# Altium PCB IG-2.PCBDOC (part 3 of 3)
Units mm, origin at the board's own origin, x right, y up, seen from the top; angles counter-clockwise.
Board outline 46.6 x 24.5 mm, 4 copper layers (Top, GND Plane, Mid1-Ver, Bottom), stack 1.565 mm thick; 34 components, 46 nets, 339 pads, 275 vias.
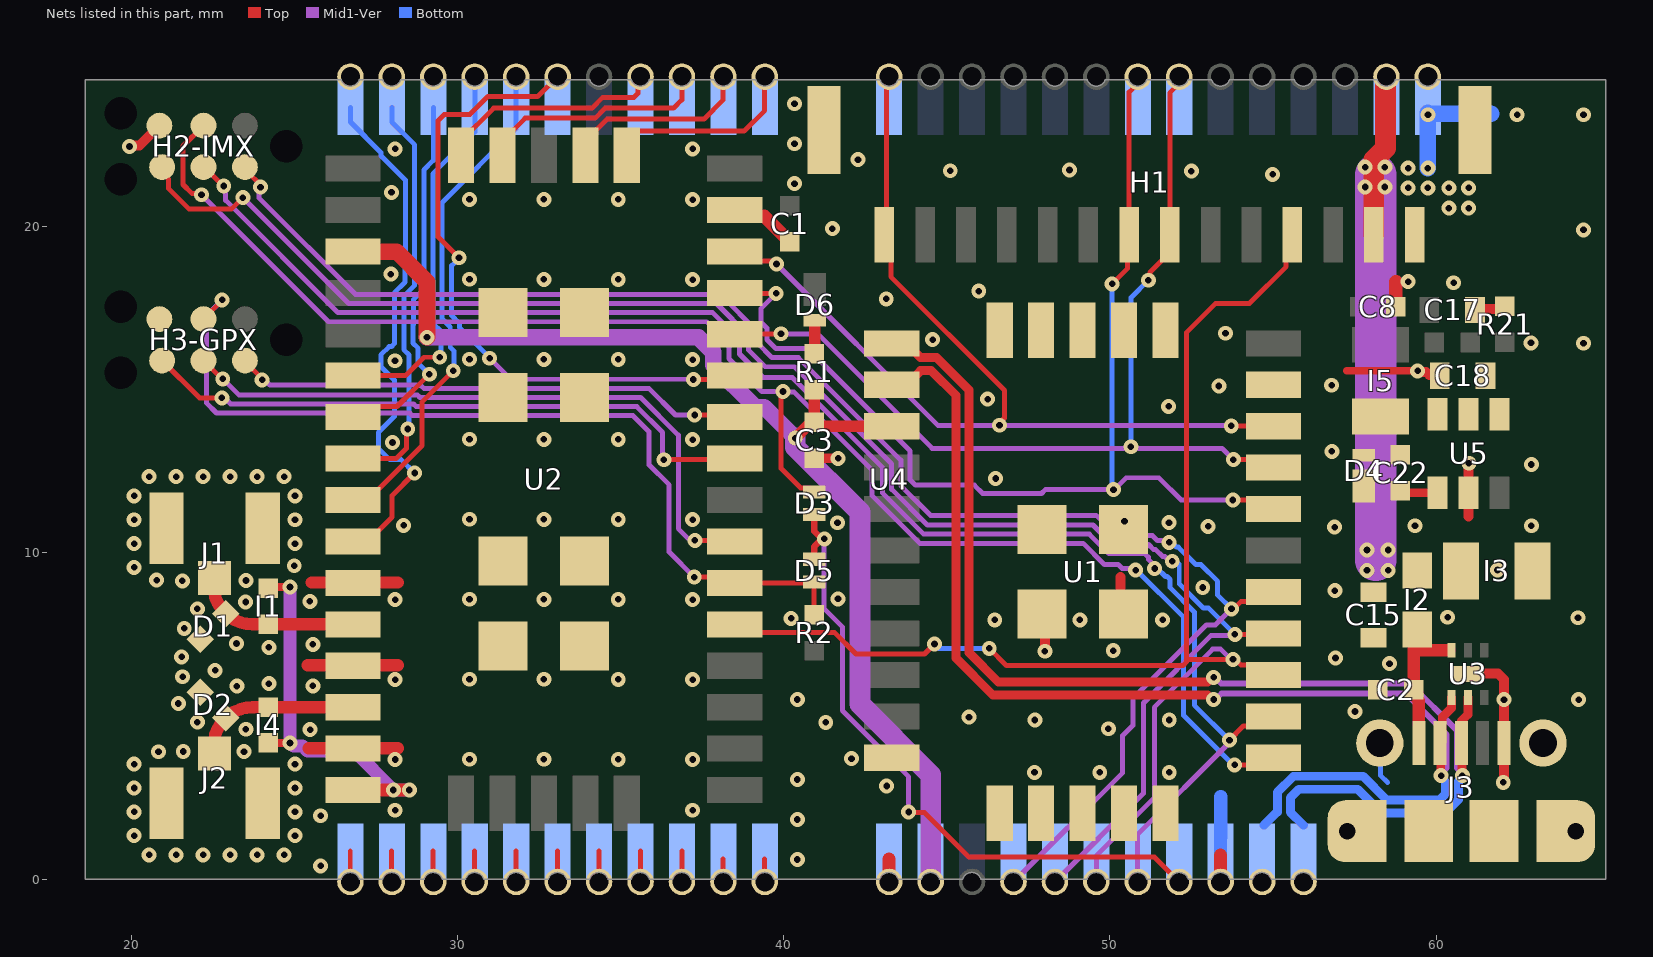
[diagram p4: the nets of this part, all layers, seen from the top]

## Via types
v1: diameter 0.457, hole 0.203, Top to Bottom, 275 vias

## Nets (pads, with @x,y where several pads share a name; then routed paths per layer and width w, separated by ;. In a path a pad name is that pad's centre, name@x,y a point inside that pad or via, vN(x,y) a via of type N, cw(c..) or ccw(c..) an arc to the next point about the centre after c; other vN are vias at no path point) (continued)
G11/SWDIO: H2-IMX.2 U1.16 U4.18 | length 50.1
  Top w0.152: H2-IMX.2@23.49,21.82 23.49,21.661 23.577,21.661 23.965,21.274 v1(23.965,21.203) ; v1(53.723,8.279) 53.792,8.279 54.011,8.498 54.888,8.498 U1.16@55.186,8.797
  Mid1-Ver w0.152: v1(23.965,21.203) 23.928,21.165 23.928,20.866 26.877,17.917 38.057,17.917 39.207,16.766 39.207,16.415 39.643,15.979 40.448,15.979 43.59,12.837 43.59,12.056 44.499,11.148 49.576,11.148 50.195,10.529 51.298,10.529 51.452,10.374 51.754,10.374 v1(51.812,10.316) ; U4.18@47.043,-0.09 50.388,3.255 50.388,4.396 50.699,4.707 50.699,5.534 52.956,7.79 53.235,7.79 v1(53.723,8.279)
  Bottom w0.152: v1(51.812,10.316) 51.895,10.316 52.039,10.172 52.096,10.172 52.635,9.633 52.791,9.633 53.3,9.125 53.3,8.702 v1(53.723,8.279)
G12/SWO: H2-IMX.6 U1.15 U4.19 | length 51.8
  Top w0.152: H2-IMX.6@20.95,21.82 20.95,21.647 21.141,21.456 21.141,21.166 21.769,20.538 23.083,20.538 v1(23.428,20.883) ; v1(53.825,7.498) 55.158,7.498 U1.15@55.186,7.527
  Mid1-Ver w0.152: v1(23.428,20.883) 26.673,17.637 37.941,17.637 38.928,16.65 38.928,16.207 39.435,15.7 40.332,15.7 42.294,13.738 43.311,12.721 43.311,11.941 44.404,10.848 49.481,10.848 50.079,10.25 51.182,10.25 51.337,10.095 51.403,10.095 51.614,9.884 51.683,9.884 51.827,9.74 v1(51.909,9.74) ; U4.19@48.313,-0.09 51.029,2.626 51.029,5.397 53.093,7.46 53.787,7.46 v1(53.825,7.498)
  Bottom w0.152: 52.123,9.651 52.123,9.044 52.867,8.3 53.023,8.3 v1(53.825,7.498)
G14/SWCLK: H2-IMX.4 U1.13 U4.21 | length 48.9
  Top w0.152: H2-IMX.4@22.22,21.812 22.248,21.812 22.82,21.24 v1(22.84,21.24) ; v1(53.661,4.255) 53.661,4.263 54.086,4.688 54.888,4.688 U1.13@55.186,4.987
  Mid1-Ver w0.152: v1(22.84,21.24) 22.898,21.182 22.898,20.802 26.342,17.358 37.825,17.358 38.648,16.535 38.648,16.091 39.368,15.372 40.265,15.372 43.032,12.605 43.032,11.825 44.288,10.568 49.366,10.568 49.964,9.97 51.066,9.97 51.174,9.863 51.174,9.796 51.369,9.601 v1(51.369,9.519) ; U4.21@50.847,-0.09 50.847,1.372 53.661,4.186 v1(53.661,4.255)
  Bottom w0.152: v1(51.369,9.519) 51.451,9.519 51.7,9.27 51.754,9.27 51.844,9.181 51.844,8.929 52.586,8.186 52.586,5.329 v1(53.661,4.255)
GND: C1.2 C2.2 C3.2 C8.2 C15.2 C17.2 C18.2 D1.2 D2.2 D4.A H1.0 H1.1 H2-IMX.5 H3-GPX.5 J1.2 J1.3 J2.2 J2.3 J3.5 J3.6 J3.7 J3.8 J3.9 R21.1 U1.0 U1.11 U1.21 U1.23 U1.24 U2.0 U2.11 U2.13 U2.15 U2.31 U3.7 U4.1 U4.15 U4.23 U4.37 U4.38 U4.39 U4.40 U4.41 U4.42 U4.43 U4.44 U4.45 U4.46 U4.47 U5.2 | length 41.1
  Top w0.152: U4.37@26.717,0.16 26.717,0.86 ; U4.38@27.987,0.16 27.987,0.86 ; U4.39@29.257,0.16 29.257,0.86 ; U4.40@30.527,0.16 30.527,0.86 ; U4.41@31.797,0.16 31.797,0.86 ; U4.42@33.067,0.16 33.067,0.86 ; U4.43@34.337,0.16 34.337,0.86 ; U4.44@35.607,0.16 35.607,0.86 ; U4.45@36.877,0.16 36.877,0.86 ; U4.46@38.147,-0.09 38.147,0.61 ; U4.47@39.417,-0.09 39.417,0.61 ; v1@42.059,3.671 v1(42.078,3.69)
  Top w0.229: 57.261,15.572 v1@59.503,15.572
  Top w0.3: v1(59.43,15.572) 59.46,15.542 59.688,15.542 59.788,15.442
  Top w0.305: v1(19.95,22.45) 19.979,22.479 20.259,22.479 H2-IMX.5@20.87,23.09 ; C3.2@40.942,12.896 41.664,12.896 v1(41.67,12.89) ; U1.0@47.911,8.117 48.004,8.024 v1(48.004,6.981) ; U1.0@50.318,8.21 50.318,9.252 ; U3.7@60.969,6.285 60.981,6.297 61.892,6.297 62.071,6.119 v1@62.071,3.168 ; 60.988,11.108 U5.2@60.988,11.842 60.994,11.848 60.994,12.736 v1(60.999,12.742) ; C17.2@61.188,17.442 61.213,17.467 62.063,17.467 R21.1@62.088,17.492
  Top w0.378: 25.41,6.548 28.175,6.548 ; 25.45,4.008 28.175,4.008 ; 25.54,9.088 28.175,9.088
  Top w0.406: U2.31@38.501,20.506 38.698,20.309 39.401,20.309 C1.2@40.185,19.525 ; U4.15@43.227,-0.09 43.227,0.61 ; U4.23@53.387,-0.09 53.39,0.739 ; C8.2@58.755,17.541 58.755,18.307 58.773,18.307
  Bottom w0.152: J3.6@58.296,3.929 58.296,3.17 58.504,2.961
  Bottom w0.406: U4.23@53.387,-0.09 53.394,2.53
  Bottom w0.508: v1(59.741,21.787) 59.737,21.791 59.737,23.475 59.759,23.453 61.687,23.453
  other v1: 25.811,0.405 40.42,0.6 20.552,0.741 21.38,0.741 22.208,0.741 23.036,0.741 23.864,0.741 24.692,0.741 20.092,1.33 25.024,1.33 40.42,1.825 25.811,1.94 20.092,2.06 25.024,2.06 28.093,2.107 37.21,2.107 20.092,2.79 25.024,2.79 43.156,2.85 62.053,2.964 40.42,3.05 47.685,3.27 49.685,3.27 51.817,3.27 20.092,3.52 25.024,3.52 28.093,3.661 32.651,3.67 34.931,3.669 37.21,3.661 30.372,3.671 20.84,3.9 21.6,3.91 23.461,3.905 25.489,4.579 23.52,4.59 49.952,4.607 22.03,4.81 41.288,4.8 47.7,4.872 51.817,4.872 45.681,4.962 57.509,5.133 21.45,5.38 62.074,5.498 64.361,5.498 40.42,5.5 23.24,5.91 25.57,5.92 24.222,5.99 28.093,6.113 30.372,6.123 32.651,6.121 34.931,6.12 37.21,6.113 21.58,6.2 22.574,6.393 58.566,6.603 56.912,6.772 21.55,6.81 50.1,7 24.222,7.098 25.57,7.19 23.23,7.22 21.63,7.68 46.47,7.943 49.077,7.943 51.614,7.943 40.23,7.99 64.343,8.007 60.35,8.023 22.03,8.28 23.51,8.49 25.48,8.51 28.093,8.564 34.931,8.571 37.21,8.564 30.372,8.574 32.651,8.573 41.664,8.588 56.894,8.838 52.843,8.935 21.57,9.14 23.522,9.15 20.782,9.161 61.877,9.469 20.092,9.551 25,9.6 20.092,10.281 25.024,10.281 53.009,10.807 56.885,10.785 59.348,10.827 62.914,10.826 28.353,10.837 41.65,10.92 51.809,10.92 50.444,10.961 20.092,11.011 25.024,11.011 30.372,11.026 32.651,11.024 34.931,11.023 37.21,11.016 20.092,11.741 25.024,11.741 46.495,12.275 20.552,12.33 21.38,12.33 22.208,12.33 23.036,12.33 23.864,12.33 24.692,12.33 62.914,12.703 56.798,13.108 28.01,13.38 34.931,13.474 37.21,13.467 30.372,13.477 32.651,13.476 51.799,14.484 46.251,14.709 53.335,15.11 56.792,15.132 28.087,15.884 30.372,15.929 32.651,15.927 34.931,15.927 37.21,15.919 64.51,16.419 62.904,16.432 44.567,16.531 53.54,16.727 43.144,17.781 45.978,18.018 60.532,18.273 59.136,18.31 37.21,18.37 30.372,18.38 32.651,18.379 34.931,18.377 27.962,18.538 64.51,19.896 41.492,19.932 60.387,20.561 60.991,20.561 30.372,20.831 32.651,20.83 34.931,20.829 37.21,20.821 27.979,21.043 59.136,21.18 59.741,21.18 60.387,21.18 60.991,21.18 40.33,21.31 54.984,21.595 52.494,21.694 45.104,21.705 48.761,21.727 59.136,21.787 42.277,22.047 28.093,22.376 37.21,22.376 40.33,22.535 59.745,23.422 62.477,23.422 64.51,23.422 40.33,23.76
GNSS1_ANT: D1.1 I1.2 J1.1 U2.12 | length 5.2
  Top w0.378: J1.1@22.524,9.225 22.524,9.006 ccw(c23.724,9.006) 23.724,7.806 U2.12@26.801,7.806
GNSS1_PPS: H1.14 U1.20 U2.30 U4.14 | length 31.2
  Top w0.152: U2.30@38.501,19.236 38.8,18.937 39.624,18.937 39.711,18.85 v1(39.78,18.85) ; U4.14@43.228,24.539 43.157,24.468 43.157,19.822 H1.14@43.087,19.751 43.285,19.553 43.285,18.459 46.767,14.978 46.767,14.127 46.614,13.975 v1(46.614,13.906) ; v1(53.715,13.89) 55.173,13.89 U1.20@55.186,13.877
  Mid1-Ver w0.152: v1(39.78,18.85) 44.724,13.906 v1(46.614,13.906) 46.616,13.904 v1@53.715,13.904 ; U4.14@43.215,24.572 U4.14@43.233,24.59
GNSS2_ANT: D2.1 I4.2 J2.1 U2.14 | length 5.2
  Top w0.378: J2.1@22.524,3.846 22.524,4.066 cw(c23.724,4.066) 23.724,5.266 U2.14@26.801,5.266
GNSS2_PPS: H1.4 U1.14 U2.21 U4.20 | length 41.9
  Top w0.152: U2.21@38.501,7.806 38.749,7.558 41.553,7.558 42.215,6.896 44.316,6.896 v1(44.623,7.203) ; v1(46.3,7.07) 46.83,6.54 52.236,6.54 52.341,6.645 52.341,6.734 52.341,16.744 53.24,17.642 54.274,17.642 55.398,18.766 55.398,19.562 H1.4@55.587,19.751 ; 52.367,6.734 53.84,6.734 54.019,6.555 54.713,6.555 U1.14@55.011,6.257
  Mid1-Ver w0.152: U4.20@49.583,-0.09 49.583,0.713 51.36,2.49 51.36,5.26 53.145,7.046 53.391,7.046 53.703,6.734 v1(53.772,6.734)
  Bottom w0.152: v1(44.623,7.203) 44.756,7.07 v1(46.3,7.07)
GPX_G5/SCLK: U2.9 U4.32 | length 15.6
  Top w0.152: U2.9@26.801,11.616 27.251,11.616 28.922,13.286 28.922,14.626 v1(29.873,15.577)
  Bottom w0.152: v1(29.873,15.577) 29.892,15.596 29.892,16.185 29.781,16.296 29.781,16.92 29.529,17.172 29.529,20.73 31.803,23.004 U4.32@31.803,23.65 U4.32@31.803,24.25 U4.32@31.803,24.59
GPX_G6/Rx1/MOSI: U2.6 U4.33 | length 11.8
  Top w0.152: U2.6@26.801,15.426 28.411,15.426 28.976,15.99 v1(29.46,15.99)
  Bottom w0.152: v1(29.46,15.99) 29.502,16.032 29.502,16.779 29.249,17.031 29.249,21.614 30.533,22.898 U4.33@30.533,23.65 U4.33@30.533,24.25
GPX_G7/Tx1/MISO: U2.7 U4.34 | length 11.5
  Top w0.152: U2.7@26.801,14.156 27.125,14.479 28.151,14.479 v1(29.141,15.469)
  Bottom w0.152: v1(29.141,15.469) 28.798,15.812 28.798,16.262 28.638,16.421 28.638,16.973 28.659,16.994 28.659,17.766 28.97,18.077 28.97,21.73 29.263,22.023 U4.34@29.263,23.65
GPX_G8/C\S\: U2.8 U4.35 | length 12.7
  Top w0.152: U2.8@26.801,12.886 28.126,12.886 28.442,13.201 28.442,13.753 v1(28.48,13.791)
  Bottom w0.152: U4.35@27.993,23.65 27.993,23.2 28.691,22.502 28.691,18.193 28.359,17.861 28.359,16.222 28.518,16.063 28.518,13.829 v1(28.48,13.791)
GPX_G9/S\P\I\_\E\N\: U2.10 U4.36 | length 16.5
  Top w0.152: U2.10@26.801,10.346 27.251,10.346 27.997,11.091 27.997,11.751 v1(28.688,12.442)
  Bottom w0.152: U4.36@26.723,23.65 26.723,23.2 27.661,22.262 27.661,22.167 28.411,21.417 28.411,19.121 28.394,19.104 28.394,18.291 28.069,17.966 28.069,16.405 27.98,16.316 27.908,16.316 27.655,16.063 27.655,15.705 28.064,15.296 28.074,15.296 28.074,14.178 27.578,13.682 27.578,13.201 27.929,12.851 28.279,12.851 v1(28.688,12.442)
GPX_G10/BOOT: U2.27 U4.31 | length 20.2
  Top w0.152: v1(30.05,19.04) 29.412,19.678 29.412,23.246 29.594,23.429 30.383,23.429 30.934,23.98 32.463,23.98 U4.31@33.073,24.59 ; v1(37.23,15.31) 38.386,15.31 U2.27@38.501,15.426
  Mid1-Ver w0.152: v1(30.99,15.96) 31.634,15.316 37.224,15.316 v1(37.23,15.31)
  Bottom w0.152: v1(30.05,19.04) 30.05,19.024 29.825,18.798 29.825,17.271 30.061,17.036 30.061,16.909 30.99,15.98 v1(30.99,15.96)
GPX_G11/SWDIO: H3-GPX.2 U2.26 | length 15.8
  Top w0.152: H3-GPX.2@23.49,15.89 23.49,15.855 24.015,15.33 v1(24.015,15.296) ; v1(37.27,14.22) 38.437,14.22 U2.26@38.501,14.156
  Mid1-Ver w0.152: v1(24.015,15.296) 24.098,15.296 24.254,15.14 28.859,15.14 28.889,15.11 28.896,15.11 28.969,15.037 35.866,15.037 36.683,14.22 v1(37.27,14.22)
GPX_G12/SWO: H3-GPX.6 U2.25 | length 19.3
  Top w0.152: H3-GPX.6@20.95,15.89 22.095,14.745 v1(22.784,14.745) ; v1(36.33,12.85) 38.466,12.85 U2.25@38.501,12.886
  Mid1-Ver w0.152: v1(22.784,14.745) 22.867,14.745 23.052,14.56 28.656,14.56 28.738,14.478 35.499,14.478 36.291,13.687 36.291,12.889 v1(36.33,12.85)
GPX_G16/QDEC0.A: U2.38 U4.26 | length 6.1
  Top w0.152: U2.38@35.191,22.176 35.191,22.626 35.49,22.924 38.791,22.924 39.417,23.55 U4.26@39.417,24.59
GPX_G17/QDEC0.B: U2.39 U4.27 | length 5.7
  Top w0.152: U2.39@33.921,22.176 33.921,22.626 34.591,23.295 37.562,23.295 38.147,23.88 U4.27@38.147,24.34
GPX_G18/QDEC1.A: U2.41 U4.28 | length 6.9
  Top w0.152: U2.41@31.381,22.176 31.381,22.626 32.076,23.32 34.221,23.32 34.526,23.625 36.622,23.625 36.877,23.88 U4.28@36.877,24.34
GPX_G19/QDEC1.B: U2.42 U4.29 | length 7
  Top w0.152: U2.42@30.111,22.176 30.111,22.626 31.111,23.625 34.126,23.625 34.456,23.955 35.411,23.955 35.53,24.074 35.53,24.507 U4.29@35.613,24.59
GPX_nRESET: D5.A H3-GPX.3 R2.2 U2.22 | length 28
  Top w0.152: H3-GPX.3@22.16,17.16 H3-GPX.3@22.22,17.16 22.22,17.168 22.791,17.739 v1(22.791,17.748) ; v1(37.26,9.25) 38.327,9.25 U2.22@38.501,9.076 40.761,9.076 40.785,9.1 D5.A@40.935,9.1 40.935,8.103 R2.2@40.942,8.097
  Mid1-Ver w0.152: v1(22.791,17.748) 22.306,17.262 22.306,14.594 22.619,14.281 28.54,14.281 28.622,14.199 35.384,14.199 35.874,13.708 35.874,12.695 36.49,12.079 36.49,10.02 v1(37.26,9.25)
GPX_Rx: H1.7 U1.19 U2.28 U4.7 | length 30.3
  Top w0.152: U2.28@38.501,16.696 38.516,16.71 v1(39.918,16.71) ; v1(51.178,18.352) 51.226,18.4 51.226,18.591 51.837,19.201 H1.7@51.837,19.751 51.837,24.093 52.118,24.374 U4.7@52.118,24.539 ; v1(53.782,12.851) 54.941,12.851 U1.19@55.186,12.607
  Mid1-Ver w0.152: v1(39.918,16.71) 41.04,16.71 44.549,13.201 50.594,13.201 v1(50.642,13.249) ; v1@50.642,13.201 53.433,13.201 v1(53.782,12.851)
  Bottom w0.152: v1(50.642,13.249) 50.642,17.816 v1(51.178,18.352)
GPX_SWCLK: H3-GPX.4 U2.23 | length 20.3
  Top w0.152: H3-GPX.4@22.22,15.89 22.78,15.33 v1(22.81,15.33) ; v1(37.28,10.38) 38.467,10.38 U2.23@38.501,10.346
  Mid1-Ver w0.152: v1(22.81,15.33) 23.301,14.839 28.772,14.839 28.853,14.758 35.615,14.758 36.769,13.603 36.769,10.737 37.077,10.429 37.231,10.429 v1(37.28,10.38)
GPX_Tx: H1.8 U1.18 U2.29 U4.8 | length 34.7
  Top w0.152: U2.29@38.501,17.966 38.517,17.95 v1(39.77,17.95) ; v1@50.067,11.974 v1(50.109,11.932) ; v1@50.067,18.242 50.541,18.715 50.541,19.705 H1.8@50.587,19.751 50.587,24.113 50.848,24.374 U4.8@50.848,24.539 ; v1(53.764,11.616) 54.907,11.616 U1.18@55.186,11.337
  Mid1-Ver w0.152: v1(39.77,17.95) 39.309,17.489 39.309,17.06 39.487,16.882 39.487,16.531 39.759,16.259 40.737,16.259 43.878,13.118 43.878,12.229 44.038,12.069 45.845,12.069 46.097,11.817 47.904,11.817 48.018,11.932 50.131,11.932 50.497,12.298 51.498,12.298 52.18,11.616 v1(53.764,11.616)
  Bottom w0.152: v1@50.067,11.974 v1@50.067,18.242
  other v1: 50.067,18.238
IMX_nRESET: D3.A H2-IMX.3 U1.12 | length 49.1
  Top w0.152: v1(22.16,20.97) 22.114,21.016 21.864,21.016 21.593,21.287 21.593,22.463 H2-IMX.3@22.22,23.09 ; v1(39.98,14.94) 39.923,14.883 39.923,12.579 40.513,11.989 40.812,11.989 D3.A@40.935,11.865 ; v1(53.82,3.498) 54.737,3.498 U1.12@54.956,3.717
  Mid1-Ver w0.152: v1(22.16,20.97) 26.051,17.079 37.637,17.079 38.318,16.398 38.318,15.954 39.332,14.94 v1(39.98,14.94) 39.991,14.929 40.311,14.929 42.701,12.539 42.701,11.76 44.172,10.289 49.178,10.289 49.827,9.64 50.254,9.64 50.37,9.524 50.729,9.524 v1(50.787,9.465)
  Bottom w0.152: v1(50.787,9.465) 50.811,9.465 52.256,8.02 52.256,5.013 53.771,3.498 v1(53.82,3.498)
NetC22_1: C22.1 U5.1 | length 1.2
  Top w0.254: C22.1@58.892,12.027 58.892,12.021 59.071,11.842 U5.1@60.038,11.842
NetD6_C: D6.C R1.1 | length 1
  Top w0.356: R1.1@40.942,16.096 40.95,16.104 40.95,17.122 D6.C@40.958,17.13
nRESET: D3.C D5.C U4.22 | length 20.4
  Top w0.152: v1(43.83,2.055) 43.845,2.04 44.31,2.04 45.676,0.674 51.359,0.674 U4.22@52.123,-0.09
  Top w0.203: D5.C@40.935,9.8 40.935,10.187 41.123,10.375 41.198,10.375 v1(41.247,10.423) 41.198,10.472 41.124,10.472 40.935,10.661 D3.C@40.935,11.165
  Mid1-Ver w0.152: v1@41.232,10.438 41.232,8.298 41.8,7.73 41.8,5.164 43.83,3.134 v1(43.83,2.055)
SW: C22.2 D4.C I5.1 U5.6
USB.D_N: J3.2 U1.2 U3.1 U4.24 | length 38.8
  Top w0.272: 45.284,14.819 45.284,6.769 46.413,5.64 52.985,5.64 53.125,5.5 v1(53.175,5.5)
  Top w0.273: U1.2@42.611,15.159 43.773,15.159 44.196,15.582 44.521,15.582 45.284,14.819 ; v1(60.151,3.167) 60.135,3.183 60.135,4.151 J3.2@60.12,4.167 60.184,4.231 60.184,4.96 60.469,5.246 U3.1@60.469,5.56
  Mid1-Ver w0.177: v1(53.175,5.5) 53.232,5.5 53.419,5.687 59.068,5.687 60.324,4.431 60.324,3.411 60.151,3.238 v1(60.151,3.167)
  Bottom w0.272: U4.24@54.716,1.647 55.128,2.06 55.128,2.654 55.623,3.149 57.758,3.149 58.489,2.417 60.094,2.417 60.277,2.6 60.277,2.991 60.151,3.117 v1(60.151,3.167)
USB.D_P: J3.3 U1.1 U3.2 U4.25 | length 39.2
  Top w0.272: 45.683,14.985 45.683,6.934 46.578,6.039 52.985,6.039 53.125,6.179 v1(53.175,6.179)
  Top w0.273: U1.1@42.611,16.429 43.748,16.429 44.196,15.982 44.686,15.982 45.683,14.985 ; J3.3@60.77,4.167 60.77,4.842 60.969,5.041 U3.2@60.969,5.56 ; J3.3@60.785,4.167 60.785,3.183 v1(60.801,3.167)
  Mid1-Ver w0.177: v1(53.175,6.179) 53.221,6.179 53.409,5.991 59.194,5.991 60.628,4.557 60.628,3.411 60.801,3.238 v1(60.801,3.167)
  Bottom w0.272: U4.25@55.932,1.647 55.527,2.051 55.527,2.488 55.789,2.75 57.592,2.75 58.324,2.018 60.259,2.018 60.675,2.434 60.675,2.991 60.801,3.117 v1(60.801,3.167)
USB.VBUS: C2.1 I2.2 J3.1 U3.6 | length 3.5
  Top w0.381: I2.2@59.307,7.302 C2.1@59.307,5.799 59.417,5.69 59.417,5.517 59.467,5.467 J3.1@59.467,4.747 ; 59.543,7.009 U3.6@60.404,7.009
VANT: I1.1 I4.1 U2.16 | length 12.1
  Top w0.254: I1.1@24.204,8.906 24.204,8.95 v1(24.871,8.95) ; I4.1@24.209,4.171 v1@24.85,4.17
  Top w0.4: U2.16@26.801,2.73 v1(28.04,2.73) v1(28.53,2.73)
  Mid1-Ver w0.4: v1(24.871,8.95) v1(24.871,4.17) 24.886,4.17 24.981,4.076 25.254,4.076 25.413,3.917 26.853,3.917 v1(28.04,2.73) v1(28.53,2.73)
VBAT: C3.1 R1.2 U1.3 U2.3 U4.16 | length 36
  Top w0.356: v1(40.355,13.513) C3.1@40.714,13.872 ; C3.1@40.942,13.872 U1.3@42.966,13.872 ; C3.1@40.942,13.996 R1.2@40.942,14.996
  Top w0.508: U2.3@26.801,19.236 26.813,19.224 28.148,19.224 29.07,18.302 v1(29.07,16.6)
  Mid1-Ver w0.508: v1(29.07,16.6) 37.391,16.6 37.836,16.155 37.836,15.754 39.133,14.457 39.41,14.457 v1(40.355,13.513)
  Mid1-Ver w0.635: v1(40.355,13.513) 40.355,13.23 42.337,11.248 42.337,5.363 44.503,3.197 U4.16@44.503,-0.09
VIN: C15.1 H1.2 I2.1 I3.1 U4.2 | length 16.8
  Top w0.635: H1.2@58.087,19.751 58.087,22.043 58.442,22.399 58.442,24.514 U4.2@58.468,24.539
  Mid1-Ver w1.27: 58.138,9.772 58.138,21.213 58.138,21.58
  other v1: 57.878,9.462 58.524,9.462 57.878,10.084 58.524,10.084 57.819,21.209 58.424,21.209 57.819,21.816 58.424,21.816
VIN_P: C18.1 I3.2 U5.4 U5.5
pads on no net: H2-IMX.0 H3-GPX.0 J3.4 U2.1 U2.2 U2.4 U2.5 U2.17 U2.18 U2.19 U2.20 U2.24 U2.33 U2.34 U2.35 U2.36 U2.37 U3.3 U3.4 U3.5 U4.4

## Polygon pours and split planes (outlines as drawn)
GND on Top "GND_L01_P014" (solid, remove dead copper, pour order 14): 19.17,0.517 19.17,24 64.744,24 64.744,0.517
GND on Top "RF_GND_L-01_P-001" (solid, pour order 12): 19.17,12.9 26.163,12.9 26.163,0.51 19.17,0.51
GND on Top "NONET_L-01_P-001" (solid, pour order 15): 59.126,24.25 59.126,19.021 58.455,18.349 58.455,17.241 64.863,17.241 64.888,17.266 64.888,24.25
+3.3V on Mid1-Ver "+3.3V_L03_P010" (solid, remove dead copper, pour order 10): 19.15,0.25 19.15,24.25 64.785,24.25 64.785,0.25
GND on Mid1-Ver "RF_GND_L-03_P-001" (solid, pour order 9): 18.95,12.9 26.163,12.9 26.163,0.33 18.95,0.33
GND on Bottom "GND_L04_P013" (solid, remove dead copper, pour order 13): 19.17,0.517 19.17,24 64.744,24 64.744,0.517
GND on GND Plane (split plane): 616 vertices, not listed, extent 18.856,0.256 64.944,24.244

## Other copper
Top:
  region net VIN: 57.673,8.541 61.174,8.541 61.174,10.318 59.874,10.318 57.673,10.318
  region net +3.3V: 59.171,16.031 58.999,15.859 56.371,15.859 56.211,16.031 54.452,16.031 54.452,16.81 56.537,18.894 56.537,19.126 57.137,19.126 57.137,18.819 58.205,17.751 58.205,17.083 59.256,17.083 59.256,17.817 60.24,17.817 60.24,16.173 60.098,16.031
  region net VIN_P: 63.509,10.316 63.154,10.316 63.154,8.573 64.97,8.573 64.97,15.842 62.238,15.842 61.447,15.842 61.44,15.834 61.324,15.836 61.33,15.485 60.688,14.843 60.688,13.234 63.509,13.234
  region net SW: 57.415,15.301 57.415,12.894 60.34,12.894 60.34,14.651 59.165,14.651 59.165,15.301
Mid1-Ver:
  region net +3.3V: 56.759,18.663 56.759,17.067 56.509,16.817 55.1,16.817 54.808,17.109 56.362,18.663
Bottom:
  region net +3.3V: 56.759,18.663 56.759,17.067 56.509,16.817 55.1,16.817 54.808,17.109 56.362,18.663

## Silkscreen, mask and mechanical layers (free items; w line width, h text height)
Silkscreen Top:
  region: 51.693,9.909 cw(c49.239,9.909) 51.693,9.913 cw(c51.586,9.913) 51.693,9.913 cw(c51.586,9.913) 51.478,9.913 ccw(c49.239,9.909) 51.478,9.909 cw(c51.586,9.909)
  region: 49.134,8.756 49.134,8.258 49.347,8.258 49.347,8.788
  region: 49.244,11.639 48.926,11.101 49.135,11.009 49.135,10.822 49.347,10.848 49.347,11.009 49.551,11.096
  region: 50.472,10.687 49.934,11.005 49.842,10.796 49.817,10.796 49.842,10.584 49.929,10.38
  region: 49.818,10.796 49.598,10.788 49.311,10.762 49.172,10.743 48.935,10.698 48.805,10.665 48.64,10.608 48.534,10.553 48.478,10.518 48.438,10.486 48.396,10.446 48.369,10.405 48.346,10.369 48.333,10.333 48.324,10.296 48.321,10.261 48.321,10.221 48.325,10.192 48.34,10.146 48.358,10.106 48.385,10.068 48.431,10.02 48.474,9.984 48.526,9.948 48.605,9.907 48.692,9.866 48.794,9.827 48.894,9.793 48.988,9.764 49.079,9.739 49.079,9.962 48.94,10.002 48.808,10.047 48.699,10.094 48.614,10.139 48.581,10.166 48.549,10.201 48.537,10.224 48.533,10.247 48.533,10.272 48.546,10.297 48.569,10.323 48.6,10.348 48.634,10.37 48.679,10.392 48.731,10.415 48.775,10.43 48.824,10.448 48.888,10.465 48.962,10.485 49.066,10.507 49.176,10.527 49.283,10.543 49.429,10.559 49.609,10.577 49.841,10.59
  region: 49.134,10.435 49.134,9.142 49.347,9.174 49.347,10.468
  region: 48.51,8.807 48.824,8.816 49.097,8.839 49.309,8.867 49.546,8.913 49.676,8.946 49.84,9.003 49.947,9.058 50.003,9.093 50.042,9.124 50.085,9.165 50.112,9.205 50.135,9.242 50.148,9.278 50.157,9.315 50.16,9.349 50.16,9.39 50.155,9.419 50.14,9.465 50.123,9.505 50.095,9.542 50.05,9.591 50.006,9.627 49.955,9.662 49.876,9.704 49.788,9.745 49.687,9.784 49.587,9.817 49.493,9.846 49.401,9.872 49.401,9.649 49.541,9.609 49.673,9.563 49.782,9.517 49.866,9.472 49.9,9.445 49.932,9.409 49.943,9.386 49.948,9.363 49.948,9.339 49.935,9.314 49.911,9.288 49.88,9.262 49.846,9.241 49.802,9.218 49.75,9.196 49.705,9.18 49.656,9.163 49.593,9.146 49.519,9.126 49.414,9.103 49.304,9.084 49.198,9.068 49.052,9.052 48.872,9.034 48.51,9.017
  text "IG-2.0.3" at 64.969,16.013 h1.65 r90
  text "1" at 18.788,9.657 h2.5
  text "2" at 18.788,1.227 h2.5
Silkscreen Bottom:
  text "'.PcbRevision'" at 60.144,5.864 h2.03
Dimensions:
  drawing of 295 lines, arcs and shapes, not listed
  text "Layer" at 79.045,35.193 h1.52
  text "Name" at 89.457,35.193 h1.52
  text "Material" at 119.167,35.193 h1.52
  text "Thickness" at 141.005,35.193 h1.52
  text "Constant" at 157.511,35.193 h1.52
  text "Board Layer Stack" at 171.985,35.193 h1.52
  text "Silkscreen Top" at 89.457,32.145 h1.52
  text "Solder Mask Top" at 89.457,29.097 h1.52
  text "Solder Resist" at 119.167,29.097 h1.52
  text "0.40mil" at 141.005,29.097 h1.52
  text "3.5" at 157.511,29.097 h1.52
  text "1" at 79.045,26.049 h1.52
  text "Top" at 89.457,26.049 h1.52
  text "2.10mil" at 141.005,26.049 h1.52
  text "Dielectric1" at 89.457,23.001 h1.52
  text "PP-006" at 119.167,23.001 h1.52
  text "8.00mil" at 141.005,23.001 h1.52
  text "4.1" at 157.511,23.001 h1.52
  text "2" at 79.045,19.953 h1.52
  text "GND Plane" at 89.457,19.953 h1.52
  text "0.70mil" at 141.005,19.953 h1.52
  text "Dielectric3" at 89.457,16.905 h1.52
  text "Core-009" at 119.167,16.905 h1.52
  text "40.00mil" at 141.005,16.905 h1.52
  text "4.5" at 157.511,16.905 h1.52
  text "3" at 79.045,13.857 h1.52
  text "Mid1-Ver" at 89.457,13.857 h1.52
  text "0.70mil" at 141.005,13.857 h1.52
  text "Dielectric2" at 89.457,10.809 h1.52
  text "PP-006" at 119.167,10.809 h1.52
  text "8.00mil" at 141.005,10.809 h1.52
  text "4.1" at 157.511,10.809 h1.52
  text "4" at 79.045,7.761 h1.52
  text "Bottom" at 89.457,7.761 h1.52
  text "2.10mil" at 141.005,7.761 h1.52
  text "Solder Mask Bottom" at 89.457,4.713 h1.52
  text "Solder Resist" at 119.167,4.713 h1.52
  text "0.40mil" at 141.005,4.713 h1.52
  text "3.5" at 157.511,4.713 h1.52
  text "Silkscreen Bottom" at 89.457,1.665 h1.52
Drill Drawing:
  circle w0.127: c19.729,-9.256 r0.494
  lines w0.127: 18.356,-19.307 75.491,-19.307 ; 18.356,-8.194 75.491,-8.194 ; 26.45,-21.529 26.45,-5.972 ; 36.722,-21.529 36.722,-5.972 ; 56.592,-21.529 56.592,-5.972 ; 64.019,-21.529 64.019,-5.972 ; 18.356,-21.529 75.491,-21.529 75.491,-5.972 18.356,-5.972 18.356,-21.529 ; 19.235,-18.64 20.223,-18.64 20.223,-17.652 19.235,-17.652 19.235,-18.64 ; 19.235,-16.17 19.482,-16.17 19.729,-16.417 19.976,-16.17 20.223,-16.17 19.976,-15.924 20.223,-15.677 19.976,-15.677 19.729,-15.43 19.482,-15.677 19.235,-15.677 19.482,-15.924 19.235,-16.17 ; 19.235,-13.948 19.482,-13.948 19.482,-14.195 19.976,-14.195 19.976,-13.948 20.223,-13.948 20.223,-13.454 19.976,-13.454 19.976,-13.207 19.482,-13.207 19.482,-13.454 19.235,-13.454 19.235,-13.948 ; 19.235,-10.985 20.223,-10.985 19.729,-11.972 19.235,-10.985
  text "Symbol" at 19.689,-7.527 h1.07
  text "Hit Count" at 27.117,-7.527 h1.07
  text "Finished Hole Size" at 37.389,-7.527 h1.07
  text "Plated" at 57.258,-7.527 h1.07
  text "Hole Type" at 64.686,-7.527 h1.07
  text "2" at 27.117,-9.75 h0.89
  text "19.69mil (0.500mm)" at 37.389,-9.75 h0.89
  text "PTH" at 57.258,-9.75 h0.89
  text "Slot" at 64.686,-9.75 h0.89
  text "2" at 27.117,-11.972 h0.89
  text "33.47mil (0.850mm)" at 37.389,-11.972 h0.89
  text "PTH" at 57.258,-11.972 h0.89
  text "Round" at 64.686,-11.972 h0.89
  text "6" at 27.117,-14.195 h0.89
  text "39.17mil (0.995mm)" at 37.389,-14.195 h0.89
  text "NPTH" at 57.258,-14.195 h0.89
  text "Round" at 64.686,-14.195 h0.89
  text "47" at 27.117,-16.417 h0.89
  text "23.00mil (0.584mm)" at 37.389,-16.417 h0.89
  text "PTH" at 57.258,-16.417 h0.89
  text "Round" at 64.686,-16.417 h0.89
  text "275" at 27.117,-18.64 h0.89
  text "8.00mil (0.203mm)" at 37.389,-18.64 h0.89
  text "PTH" at 57.258,-18.64 h0.89
  text "Round" at 64.686,-18.64 h0.89
  text "332 Total" at 27.117,-20.862 h0.89
  text "Slot definitions :" at 19.689,-22.968 h0.89
  text "Routed Path Length" at 34.931,-22.968 h0.89
  text "= Calculated from tool start centre position to tool end centre position." at 51.21,-22.968 h0.89
  text "Hole Length" at 34.931,-24.407 h0.89
  text "= Routed Path Length + Tool Size = Slot length as defined in the PCB layout" at 45.137,-24.407 h0.89
Board Outline:
  lines w0.127: 65.194,24.5 60.015,24.5 cw(c59.737,24.59) 59.459,24.5 58.745,24.5 cw(c58.467,24.59) 58.189,24.5 57.475,24.5 cw(c57.197,24.59) 56.919,24.5 56.205,24.5 cw(c55.927,24.59) 55.649,24.5 54.935,24.5 cw(c54.657,24.59) 54.379,24.5 53.665,24.5 cw(c53.387,24.59) 53.109,24.5 52.395,24.5 cw(c52.117,24.59) 51.839,24.5 51.125,24.5 cw(c50.847,24.59) 50.569,24.5 49.855,24.5 cw(c49.577,24.59) 49.299,24.5 48.585,24.5 cw(c48.307,24.59) 48.029,24.5 47.315,24.5 cw(c47.037,24.59) 46.759,24.5 46.045,24.5 cw(c45.767,24.59) 45.489,24.5 44.775,24.5 cw(c44.497,24.59) 44.219,24.5 43.505,24.5 cw(c43.227,24.59) 42.949,24.5 39.695,24.5 cw(c39.417,24.59) 39.139,24.5 38.425,24.5 cw(c38.147,24.59) 37.869,24.5 37.155,24.5 cw(c36.877,24.59) 36.599,24.5 35.885,24.5 cw(c35.607,24.59) 35.329,24.5 34.615,24.5 cw(c34.337,24.59) 34.059,24.5 33.345,24.5 cw(c33.067,24.59) 32.789,24.5 32.075,24.5 cw(c31.797,24.59) 31.519,24.5 30.805,24.5 cw(c30.527,24.59) 30.249,24.5 29.535,24.5 cw(c29.257,24.59) 28.979,24.5 28.265,24.5 cw(c27.987,24.59) 27.709,24.5 26.995,24.5 cw(c26.717,24.59) 26.439,24.5 18.6,24.5 18.6,0 26.439,0 cw(c26.717,-0.09) 26.995,0 27.709,0 cw(c27.987,-0.09) 28.265,0 28.979,0 cw(c29.257,-0.09) 29.535,0 30.249,0 cw(c30.527,-0.09) 30.805,0 31.519,0 cw(c31.797,-0.09) 32.075,0 32.789,0 cw(c33.067,-0.09) 33.345,0 34.059,0 cw(c34.337,-0.09) 34.615,0 35.329,0 cw(c35.607,-0.09) 35.885,0 36.599,0 cw(c36.877,-0.09) 37.155,0 37.869,0 cw(c38.147,-0.09) 38.425,0 39.139,0 cw(c39.417,-0.09) 39.695,0 42.949,0 cw(c43.227,-0.09) 43.505,0 44.219,0 cw(c44.497,-0.09) 44.775,0 45.489,0 cw(c45.767,-0.09) 46.045,0 46.759,0 cw(c47.037,-0.09) 47.315,0 48.029,0 cw(c48.307,-0.09) 48.585,0 49.299,0 cw(c49.577,-0.09) 49.855,0 50.569,0 cw(c50.847,-0.09) 51.125,0 51.839,0 cw(c52.117,-0.09) 52.395,0 53.109,0 cw(c53.387,-0.09) 53.665,0 54.379,0 cw(c54.657,-0.09) 54.935,0 55.649,0 cw(c55.927,-0.09) 56.205,0 65.2,0 65.2,24.5

## Dimensions
65.2,0 to 65.194,24.5 on Dimensions
18.6,0 to 65.2,0 on Dimensions

## Text inside footprints (layer, text, board x,y; h text height)
U1: Silkscreen Top "22" at 52.959,16.117 h1.02; Silkscreen Top "12" at 52.986,3.417 h1.02; Silkscreen Top "11" at 44.384,3.417 h1.02; Silkscreen Top "1" at 44.384,16.117 h1.02
U2: Silkscreen Top "1" at 27.925,21.433 h1.02; Silkscreen Top "16" at 27.925,2.383 h1.02; Silkscreen Top "17" at 36.434,2.383 h1.02; Silkscreen Top "32" at 36.434,21.433 h1.02
U4: Silkscreen Bottom "36" at 27.056,22.5 h1.14 r90; Silkscreen Bottom "26" at 39.756,22.5 h1.14 r90; Silkscreen Bottom "47" at 39.09,2 h1.14 r270; Silkscreen Bottom "37" at 26.39,2 h1.14 r270; Silkscreen Bottom "C" at 59.865,4.495 h0.76; Silkscreen Bottom "2024" at 58.953,4.348 h1.27; Silkscreen Bottom "SENSE" at 28.719,5.991 h2.03; Silkscreen Bottom "INERTIAL" at 37.156,5.993 h2.03; Silkscreen Bottom "IS-IG-2.0" at 59.91,17.464 h3.81; Silkscreen Bottom "1" at 59.4,22 h1.14 r270; Silkscreen Bottom "14" at 42.9,21.5 h1.14 r270; Silkscreen Bottom "25" at 55.6,2 h1.14 r270; Silkscreen Bottom "15" at 42.9,2 h1.14 r270